# Altium PCB PCB1.PcbDoc
Units mm, origin at the board's own origin, x right, y up, seen from the top; angles counter-clockwise.
Board outline 145 x 103 mm, 2 copper layers (Top Layer, Bottom Layer); 80 components, 100 nets, 338 pads, 57 vias.
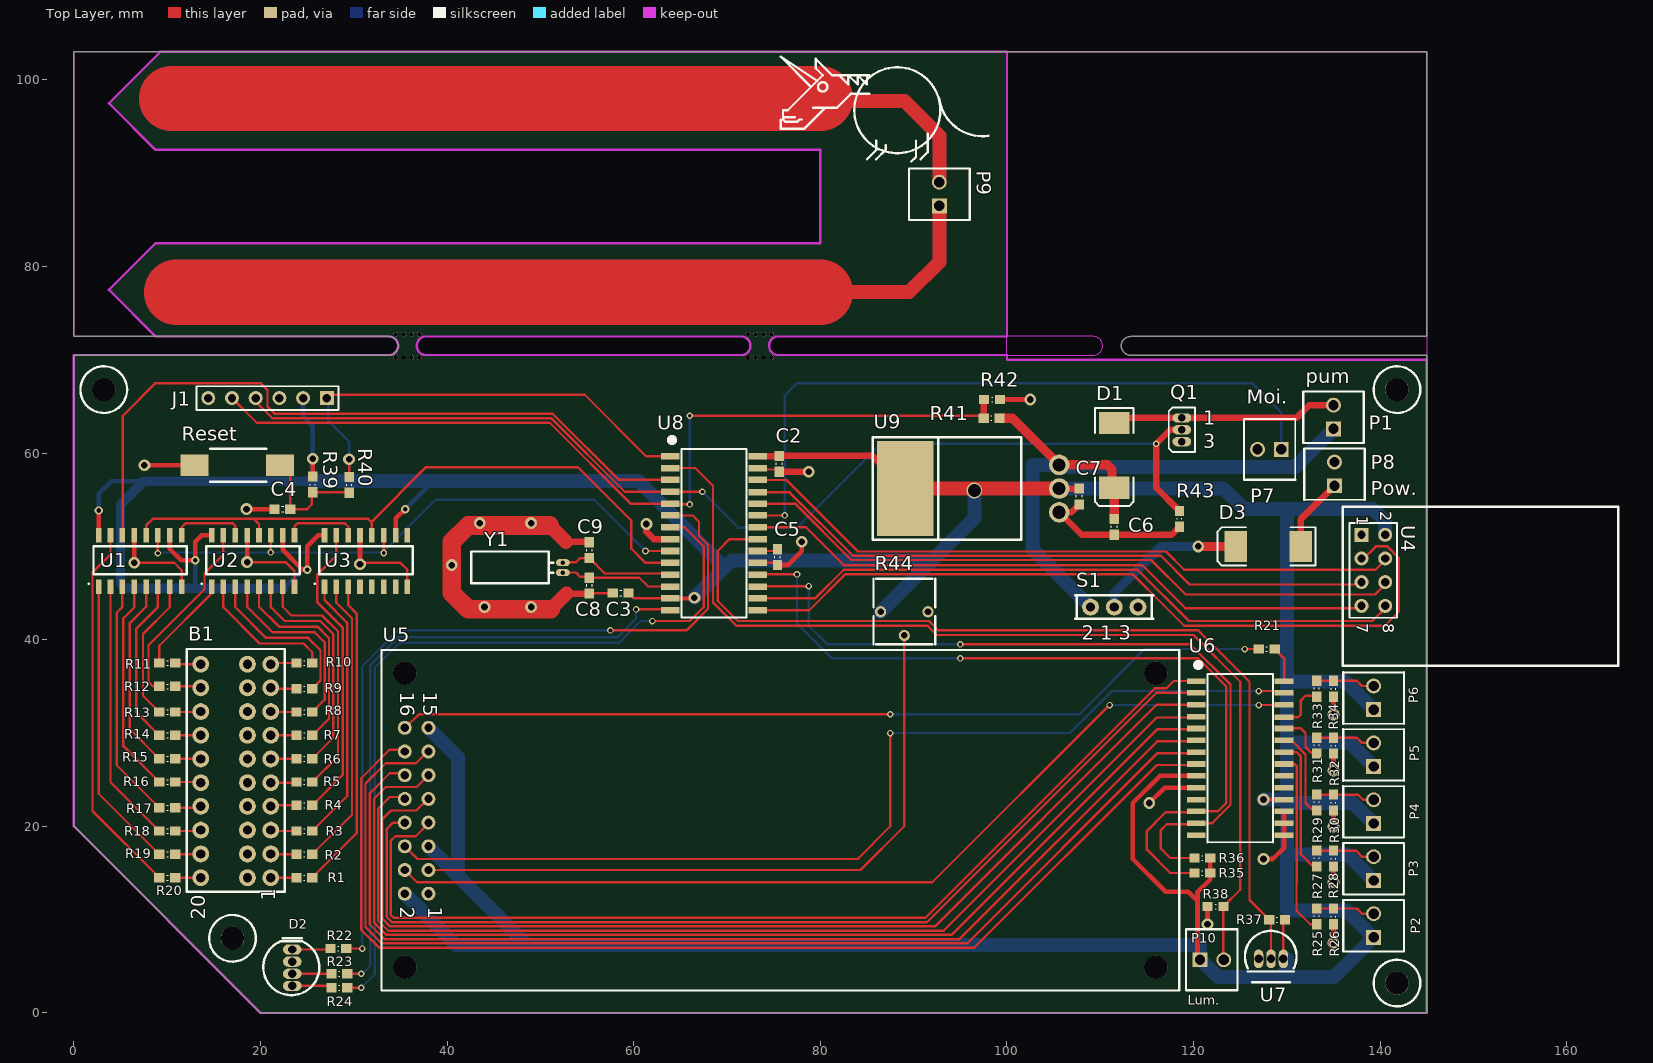
[diagram p0: Top Layer view]
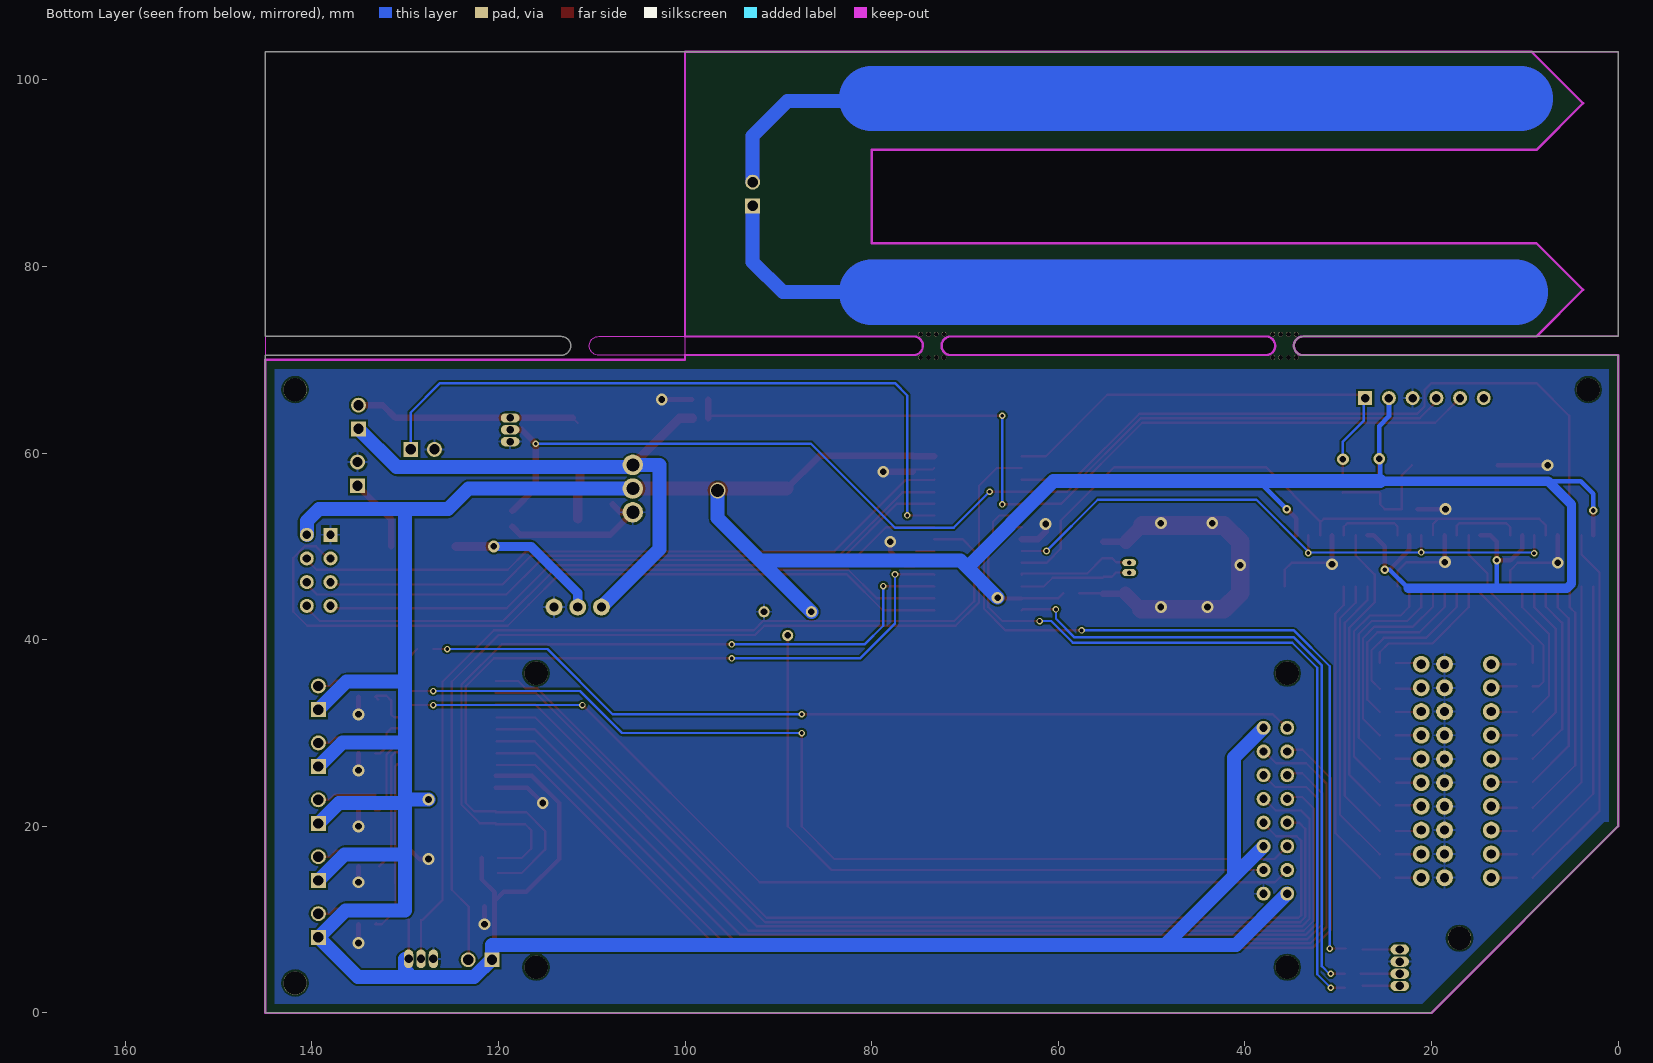
[diagram p1: Bottom Layer view, seen from below]

## Layer stack, top to bottom
Top Solder: solder mask 0.0102, Solder Resist, Dk 3.5
Top Layer: signal copper 0.0356
Dielectric 1: dielectric 0.32, FR-4, Dk 4.8
Bottom Layer: signal copper 0.0356
Bottom Solder: solder mask 0.0102, Solder Resist, Dk 3.5

## Board outline
20,0 0,20 0,70.5 33.75,70.5 ccw(c33.75,71.5) 33.75,72.5 0,72.5 0,103 145,103 145,72.5 113.25,72.5 ccw(c113.25,71.5) 113.25,70.5 145,70.5 145,70 145,0
cut-out: 100,70 100,103 145,103 145,70
cut-out: 0.642,72.5 8.75,72.5 3.75,77.5 8.75,82.5 80,82.5 80,92.5 8.75,92.5 3.75,97.5 9.25,103 0,103 0,72.5
cut-out: 37.75,70.5 71.5,70.5 ccw(c71.5,71.5) 71.5,72.5 37.75,72.5 ccw(c37.75,71.5)
cut-out: 75.5,70.5 109.25,70.5 ccw(c109.25,71.5) 109.25,72.5 75.5,72.5 ccw(c75.5,71.5)

## Design rules (kind name [scope] priority, off if disabled: settings)
Clearance [All] p1: gap=0.2
HoleSize [All] p1: absolutevalues=TRUE maxlimit=3 minlimit=0.3 maxpercent=80.000 minpercent=20.000
MinimumSolderMaskSliver [All] p1: minsoldermaskwidth=0.1
PlaneClearance [All] p1: clearance=0.2
PolygonConnect Via [All vs IsVia] p1: connectstyle=Direct reliefconductorwidth=0.254 reliefentries=4 polygonreliefangle="90 Angle" airgapwidth=0.254
PolygonConnect PolygonConnect_1 [All] p2: connectstyle=Relief reliefconductorwidth=0.254 reliefentries=4 polygonreliefangle="90 Angle" airgapwidth=0.254
RoutingVias [All] p1: holewidth=0.711 width=1.27 viastyle="Through Hole" minholewidth=0.3 minwidth=1.27 maxholewidth=1 maxwidth=2
SilkToSilkClearance [All] p1: silktosilkclearance=0.1
SilkToSolderMaskClearance [IsPad] p1: minsilkscreentomaskgap=0.1 clearancetoexposedcopper=TRUE
SolderMaskExpansion [All] p1: expansion=0.102
UnpouredPolygon [All] p1: allowunpoured=FALSE
Width [All] p1: maxlimit=25 minlimit=0.2 preferedwidth=0.254
24 further rules are at their usual default settings.

## Classes and differential pairs
component class BarGraph: B1 R1 R2 R3 R4 R5 R6 R7 R8 R9 R10 R11 R12 R13 R14 R15 R16 R17 R18 R19 R20 U1 U2 U3
component class "Ecran LCD": R21 U5
component class LedAlert: D2 R22 R23 R24
component class "Level Sensor": P2 P3 P4 P5 P6 R25 R26 R27 R28 R29 R30 R31 R32 R33 R34
component class LumSensor: P10 R38
component class MCP23017: R35 R36
component class PIC32MX170F256B: C2 C3 C4 C5 C8 C9 J1 R39 R40 Reset U8 Y1
component class Power: C6 C7 D3 P8 R41 R42 S1 U9
component class Pump: D1 P1 PUMP Q1 R43
component class SoilMoisture: P7 P9
component class TempSensor: R37 U7
net class ELECTRODE[0..4]: ELECTRODE0 ELECTRODE1 ELECTRODE2 ELECTRODE3 ELECTRODE4
net class I2C[0..1]: I2C0 I2C1
net class LCD[0..10]: LCD0 LCD1 LCD2 LCD3 LCD4 LCD5 LCD6 LCD7 LCD8 LCD9 LCD10
net class LED[0..2]: LED0 LED1 LED2
net class RD[0..2]: RD0 RD1 RD2
net class SPI[0..3]: SPI0 SPI1 SPI2 SPI3

## Components (designator, comment, footprint, x,y, rotation, side; value= is the part's Value field where it differs from the comment)
B1 "BargraphRG" BargraphRG 18.6,14.5 r90 top
C2 "0.1uF" C0603 75.6,58 r90 top
C3 "0.1uF" C0603 57.75,45 r0 top
C4 "0.1uF" C0603 21.5,54 r0 top
C5 "10uF" C0603 75.4,49.7 r270 top
C6 "10uF" C0603 111.5,51.25 r90 top
C7 "100nF" C0603 107.75,54.5 r90 top
C8 "15pF" C0603 55.25,44.95 r90 top
C9 "15pF" C0603 55.25,50.45 r270 top
D1 "Diode" SMC 111.5,59.75 r270 top
D2 "LED_RGB" LED1 23.4,4.9 r90 top
D3 "Diode" SMC 128,50 r180 top
J1 "Program/Debug" HDR1X6 27.1,65.9 r180 top
P1 "Header Pompe" BORNIER 135,62.6 r90 top
P2 "Header 2" BORNIER 139.3,8.1 r90 top
P3 "Header 2" BORNIER 139.3,14.2 r90 top
P4 "Header 2" BORNIER 139.3,20.3 r90 top
P5 "Header 2" BORNIER 139.3,26.4 r90 top
P6 "Header 2" BORNIER 139.3,32.5 r90 top
P7 "Header Sensor" BORNIER 129.4,60.4 r180 top
P8 "Header BAT" BORNIER 135.1,56.5 r90 top
P9 "Header Sensor" BORNIER 92.75,86.5 r90 top
P10 "Header 2" BORNIER 120.7,5.7 r0 top
Q1 "IRFZ24N" E3 118.75,62.5 r0 top
R1 "220Ω" R0603 23.85,14.5 r0 top
R2 "220Ω" R0603 23.85,17 r0 top
R3 "220Ω" R0603 23.85,19.5 r0 top
R4 "220Ω" R0603 23.85,22.25 r0 top
R5 "220Ω" R0603 23.85,24.75 r0 top
R6 "220Ω" R0603 23.85,27.25 r0 top
R7 "220Ω" R0603 23.85,29.75 r0 top
R8 "220Ω" R0603 23.85,32.25 r0 top
R9 "220Ω" R0603 23.85,34.75 r0 top
R10 "220Ω" R0603 23.85,37.5 r0 top
R11 "160Ω" R0603 10.85,37.5 r180 top
R12 "160Ω" R0603 10.85,35 r180 top
R13 "160Ω" R0603 10.85,32.25 r180 top
R14 "160Ω" R0603 10.85,29.75 r180 top
R15 "160Ω" R0603 10.85,27.25 r180 top
R16 "160Ω" R0603 10.85,24.75 r180 top
R17 "160Ω" R0603 10.85,22 r180 top
R18 "160Ω" R0603 10.85,19.5 r180 top
R19 "160Ω" R0603 10.85,17 r180 top
R20 "160Ω" R0603 10.85,14.5 r180 top
R21 "600Ω" R0603 127,39 r0 top
R22 "140Ω" R0603 27.5,6.9 r0 top
R23 "20Ω" R0603 27.6,4.2 r0 top
R24 "30Ω" R0603 27.6,2.7 r0 top
R25 "1KΩ" R0603 133.2,11.2 r270 top
R26 "10MΩ" R0603 135,9.5 r90 top
R27 "1KΩ" R0603 133.2,17.4 r270 top
R28 "10MΩ" R0603 135,15.7 r90 top
R29 "1KΩ" R0603 133.2,23.4 r270 top
R30 "10MΩ" R0603 135,21.7 r90 top
R31 "1KΩ" R0603 133.2,29.5 r270 top
R32 "10MΩ" R0603 135,27.8 r90 top
R33 "1KΩ" R0603 133.2,35.6 r270 top
R34 "10MΩ" R0603 135,33.9 r90 top
R35 "4.7KΩ" R0603 120.1,15 r0 top
R36 "4.7KΩ" R0603 120.1,16.6 r0 top
R37 "4.7K" R0603 128.1,10 r0 top
R38 "Res1" R0603 123.2,11.4 r180 top
R39 "10K" R0603 25.6,55.8 r90 top
R40 "1K" R0603 29.5,55.75 r90 top
R41 "2M" R0603 97.5,63.75 r0 top
R42 "1M" R0603 99.25,65.75 r180 top
R43 "10K" R0603 118.5,53.8 r270 top
R44 "RPot" POTARD 89,43 r180 top
Reset "SW-PB" Reset 22.1,58.7 r180 top
S1 "SW-On/Off" "Switch on/off" 111.5,43.5 r0 top
U1 "74HC595-0" SN74HC595D 7.1,48.5 r0 top
U2 "74HC595-1" SN74HC595D 19.2,48.5 r0 top
U3 "74HC595-2" SN74HC595D 31.3,48.5 r0 top
U4 "Nrf24L01" NRF24L01 138,51.25 r270 top
U5 "FC1602B04-FHYYBW-91LE" FC1602B04-FHYYBW-91LE 38,20.4 r270 top
U6 "MCP23017" MCP23017 125,29.3 r270 top
U7 "DS18B20+" DS18B20+ 128.3,5.8 r0 top
U8 "PIC32MX170F256B" PIC32MX170F256B 68.6,53.4 r270 top
U9 "LM1117D-33" VoltReg3.3V 105.6,56.2 r90 top
Y1 "32.768kHz" XTAL 52.4,47.75 r90 top

## Footprints (in the part's own frame and the unit in brackets; to place one, negate y for a bottom-side part, rotate by r counter-clockwise, add the part's x,y. Pads: shape width x height; smd on the part's side, far side on the other; paste and mask are expansions set on the pad)
BargraphRG [mm]
  round 1.8 hole 1: 1(0,-2.5) 2(2.54,-2.5) 3(5.1,-2.5) 4(7.64,-2.5) 5(10.18,-2.5) 6(12.72,-2.5) 7(15.26,-2.5) 8(17.8,-2.5) 9(20.34,-2.5) 10(22.88,-2.5) 11(22.88,5) 12(20.34,5) 13(17.8,5) 14(15.26,5) 15(12.72,5) 16(10.18,5) 17(7.64,5) 18(5.1,5) 19(2.54,5) 20(0,5) 21(0,0) 22(2.54,0) 23(5.1,0) 24(7.64,0) 25(10.18,0) 26(12.72,0) 27(15.26,0) 28(17.8,0) 29(20.34,0) 30(22.88,0)
  silkscreen extent -1.5,-4 24.5,6.5
BORNIER [mm]
  rect 1.6x1.6 hole 1.1: 1(0,0)
  round 1.6 hole 1.1: 2(2.54,0)
  silkscreen extent -1.5,-3.25 4,3.25
C0603 [mm]
  rect 1.1x1 smd: 1(0,0) 2(1.7,0)
  silkscreen extent 0.75,-0.3 0.97,0.3
DS18B20+ [mm] "DS18B20+"
  oval 1x2 hole 0.9: 1(-1.33,0) 2(0,0) 3(1.33,0)
  silkscreen extent -2.79,-2.5 2.74,3
E3 [mm] "TO, Flat Index; 3 In-Line, Axial Leads; Body Dia. 4.6mm; Lead Dia. 0.5 mm (max)"
  oval 2x1 hole 0.8: 1(0,1.27) 2(0,0) 3(0,-1.27)
  silkscreen extent -1.41,-2.41 1.41,2.41
FC1602B04-FHYYBW-91LE [mm] "LCD"
  round 1.5 hole 0.9: 1(7.62,0) 2(7.62,-2.54) 3(5.08,0) 4(5.08,-2.54) 5(2.54,0) 6(2.54,-2.54) 7(0,0) 8(0,-2.54) 9(-2.54,0) 10(-2.54,-2.54) 11(-5.08,0) 12(-5.08,-2.54) 13(-7.62,0) 14(-7.62,-2.54) 15(-10.16,0) 16(-10.16,-2.54)
  round 2.5 hole 2.5 unplated: NC(-16,77.96) NC(-16,-2.54) NC(15.5,77.96) NC(15.5,-2.54)
  silkscreen extent -18.5,-5.04 18,80.46
HDR1X6 [mm] "Connector; Header; 6 Position"
  rect 1.5x1.5 hole 0.9: 1(0,0)
  round 1.5 hole 0.9: 2(2.54,0) 3(5.08,0) 4(7.62,0) 5(10.16,0) 6(12.7,0)
  silkscreen extent -1.27,-1.27 13.97,1.27
LED1 [mm] "LedRGB"
  oval 1.1x2 hole 0.9: 1(1.9,0) 2(0.6,0) 3(-0.7,0) 4(-2,0)
  silkscreen extent -3,-2.9 3.1,3.1
MCP23017 [mm]
  rect 0.6x2 smd: 1(-6.27,-4.7) 2(-5,-4.7) 3(-3.73,-4.7) 4(-2.46,-4.7) 5(-1.19,-4.7) 6(0.08,-4.7) 7(1.35,-4.7) 8(2.62,-4.7) 9(3.89,-4.7) 10(5.16,-4.7) 11(6.43,-4.7) 12(7.7,-4.7) 13(8.97,-4.7) 14(10.24,-4.7) 15(10.24,4.7) 16(8.97,4.7) 17(7.7,4.7) 18(6.43,4.7) 19(5.16,4.7) 20(3.89,4.7) 21(2.62,4.7) 22(1.35,4.7) 23(0.08,4.7) 24(-1.19,4.7) 25(-2.39,4.7) 26(-3.73,4.7) 27(-5,4.7) 28(-6.27,4.7)
  silkscreen extent -8.05,-4.55 11.01,3.5
NRF24L01 [mm]
  rect 1.5x1.5 hole 0.9: 1(0,0)
  round 1.5 hole 0.9: 2(0,2.54) 3(2.54,0) 4(2.54,2.54) 5(5.08,0) 6(5.08,2.54) 7(7.62,0) 8(7.62,2.54)
  silkscreen extent -3,-2 14.03,27.5
PIC32MX170F256B [mm]
  rect 0.7x2 smd: 1(-6.27,-4.7) 2(-5,-4.7) 3(-3.73,-4.7) 4(-2.46,-4.7) 5(-1.19,-4.7) 6(0.08,-4.7) 7(1.35,-4.7) 8(2.62,-4.7) 9(3.89,-4.7) 10(5.16,-4.7) 11(6.43,-4.7) 12(7.7,-4.7) 13(8.97,-4.7) 14(10.24,-4.7) 15(10.24,4.7) 16(8.97,4.7) 17(7.7,4.7) 18(6.43,4.7) 19(5.16,4.7) 20(3.89,4.7) 21(2.62,4.7) 22(1.35,4.7) 23(0.08,4.7) 24(-1.19,4.7) 25(-2.39,4.7) 26(-3.73,4.7) 27(-5,4.7) 28(-6.27,4.7)
  silkscreen extent -8.05,-4.55 11.01,3.5
POTARD [mm]
  round 1.2 hole 0.7: 1(2.54,0.005) 2(0,2.545) 3(-2.54,0.005)
  silkscreen extent -3.3,-3.52 3.3,3.5
R0603 [mm]
  rect 1.1x1 smd: 1(0,0) 2(1.7,0)
  silkscreen extent 0.76,-0.25 0.89,0.25
Reset [mm]
  rect 3x2.3 smd: 1(0,0) 2(9.2,0)
  silkscreen extent 1.5,-1.75 7.5,1.75
SMC [mm] "DO-214-AB/SMC; 2 C-Bend Leads; Body 7.9 x 5.9 mm, inc. leads (LxW)"
  rect 2.4x3.3 smd: 1(-3.475,0) 2(3.475,0)
  silkscreen extent -5.07,-2.05 5.43,2.05
SN74HC595D [mm]
  rect 0.6x1.55 smd: 1(-4.445,-2.8) 2(-3.175,-2.8) 3(-1.905,-2.8) 4(-0.635,-2.8) 5(0.635,-2.8) 6(1.905,-2.8) 7(3.175,-2.8) 8(4.445,-2.8) 9(4.445,2.7) 10(3.175,2.7) 11(1.905,2.7) 12(0.635,2.7) 13(-0.635,2.7) 14(-1.905,2.7) 15(-3.175,2.7) 16(-4.445,2.7)
  silkscreen extent -5.5,-2.5 5,1.5
"Switch on/off" [mm]
  round 1.8 hole 1: 1(0,0) 2(-2.54,0) 3(2.54,0)
  silkscreen extent -4.21,-1.25 4.21,1.25
VoltReg3.3V [mm]
  round 2.2 hole 1.4: 1(-2.54,0) 2(0,0) 3(2.54,0)
  rect 10.16x6.1 smd: 4(0,16.5)
  silkscreen extent -5.5,4.06 5.5,20
XTAL [mm]
  oval 0.75x1.5 hole 0.5: 1(-0.56,0) 2(0.51,0)
  silkscreen extent -1.7,1 1.7,9.8

## Part data
C2 C3 C4 C5 C6 C7 C8 C9: library part Cap, "Capacitor"
D1 D3: "Default Diode"
J1: library part "Header 6", "Header, 6-Pin"
P1 P7 P8 P9: library part "Header 2", "Header, 2-Pin"
P2 P3 P4 P5 P6 P10: "Header, 2-Pin"
Q1: library part MOSFET-N, "N-Channel MOSFET"
R1 R2 R3 R4 R5 R6 R7 R8 R9 R10 R11 R12 R13 R14 R15 R16 R17 R18 R19 R20 R21 R22 R23 R24 R25 R26 R27 R28 R29 R30 R31 R32 R33 R34 R35 R36 R37 R39 R40 R41 R42 R43: library part Res1, "Resistor"
R38: "Resistor"
R44: "Potentiometer"
Reset: "Switch"
S1: library part SW-SPDT, "SPDT Subminiature Toggle Switch, Right Angle Mounting, Vertical Actuation"
U1 U2 U3: library part 74HC595
U4: library part "Header 4X2", "Header, 4-Pin, Dual row"
U6: library part MPC23017
Y1: library part XTAL, "Crystal Oscillator"

## Free pads (board coordinates)
  round 2.5 hole 2.5 unplated: ""(3.2,66.8) ""(17,8) ""(141.8,3.2) ""(141.8,66.8)
  round 0.5 hole 0.5 unplated: ""(34.5,70.25) ""(34.5,72.75) ""(35.333,70.25) ""(35.333,72.75) ""(36.167,70.25) ""(36.167,72.75) ""(37,70.25) ""(37,72.75) ""(72.25,70.25) ""(72.25,72.75) ""(73.083,70.25) ""(73.083,72.75) ""(73.917,70.25) ""(73.917,72.75) ""(74.75,70.25) ""(74.75,72.75)

## Via types
v1: diameter 1.27, hole 0.711, Top Layer to Bottom Layer, 27 vias
v2: diameter 0.7, hole 0.4, Top Layer to Bottom Layer, 25 vias
v3: diameter 0.9, hole 0.5, Top Layer to Bottom Layer, 4 vias
v4: diameter 1.7, hole 1.4, Top Layer to Bottom Layer, 1 vias

## Nets (pads, with @x,y where several pads share a name; then routed paths per layer and width w, separated by ;. In a path a pad name is that pad's centre, name@x,y a point inside that pad or via, vN(x,y) a via of type N, cw(c..) or ccw(c..) an arc to the next point about the centre after c; other vN are vias at no path point)
3.3V: C2.2 C3.2 C7.2 J1.2 P2.1 P3.1 P4.1 P5.1 P6.1 P10.1 R35.2 R36.2 R37.2 R39.2 R44.1 U1.10 U1.16 U2.10 U2.16 U3.10 U3.16 U4.2 U5.2 U5.5 U5.15 U6.9 U6.18 U7.3 U8.13 U8.28 U9.2 U9.4 | length 559.5
  Top Layer w0.254: C3.2 60.02,44.43 U8.13 ; v1@66.43,44.43 v1(66.5,44.5) ; U7.3 R37.2@129.63,10
  Top Layer w0.4: U8.13 v1@66.43,44.43 ; v1(127.5,22.87) U6.18
  Top Layer w0.5: U1.16 v3(2.655,53.845) ; U1.10 10.275,49.725 11.5,48.5 v3(13,48.5) 13,50.5 13.7,51.2 U2.16 ; U2.10 22.375,49.625 24.5,47.5 v3(25,47.5) 25,50 26.2,51.2 U3.16 ; R39.2 v1(25.6,59.4) ; U3.10 34.5,51.225 34.5,53 v3(35.5,54) ; U6.9 116.41,25.41 113.5,22.5 113.5,16.5 117,13 119.415,13 120.415,12 ; P10.1 120.415,5.985 120.415,12 ; R36.2 R35.2 121.8,14.3 120.415,12.915 120.415,12
  Top Layer w0.7: U8.28 75.57,59.67 C2.2 85.6,59.7 U9.4 ; U9.2 C7.2
  Top Layer w1.5: U9.4 U9.2
  Bottom Layer w0.5: v3(2.655,53.845) 2.655,55.655 4,57 7.5,57 ; 13,45.5 v3(13,48.5) ; 22.5,45.5 24.5,47.5 v3(25,47.5) ; J1.2 24.56,63.94 25.6,62.9 v1(25.6,59.4) ; 25.5,57 v1@25.5,59.3 ; v3(35.5,54) 38.5,57
  Bottom Layer w1: 22.5,45.5 13,45.5 5.5,45.5 5,46 5,54.5 7.5,57 25.5,57 ; 129.5,3.85 129.5,4.449 129.75,4.699 U7.3@129.75,5.8
  Bottom Layer w1.5: 25.5,57 38.5,57 60.5,57 69.75,47.75 ; U5.2 40.94,7.3 48.56,7.3 ; U5.5 41.18,14.68 ; U5.15 41.18,27.38 41.18,14.68 ; v1(66.5,44.5) 69.75,47.75 ; R44.1 91.965,48.5 ; v4(96.5,56) 96.5,53.035 91.965,48.5 ; U9.2 123.2,56.2 125.4,54 130,54 ; v1(127.5,22.87) 129.63,22.87 130,22.5 ; 130,3.85 U7.3@130,5.8 ; P3.1 136.5,17 130,17 ; P4.1 137.1,22.5 130,22.5 ; P5.1 136.7,29 130,29 ; P6.1 136.3,35.5 130,35.5 ; U4.2 140.54,52.71 139.25,54 130,54 ; 41.18,14.68 48.56,7.3 ; 48.56,7.3 120.7,7.3 P10.1 120.765,5.7 122.615,3.85 129.5,3.85 135.05,3.85 P2.1 136.4,11 130,11 130,17 ; 69.75,47.75 70.5,48.5 91.965,48.5 ; 130,17 130,22.5 ; 130,22.5 130,29 ; 130,29 130,35.5 ; 130,35.5 130,54
7.4V: C6.2 D1.2 P1.1 R41.2 S1.2 U9.3 | length 71.5
  Top Layer w1: R41.2 100.59,63.75 U9.3 105.61,58.75 110.75,58.75 111.25,58.25 111.25,56.525 D1.2 C6.2
  Bottom Layer w1.5: U9.3@105.6,58.5 130.9,58.5 P1.1 ; U9.3 102.74,58.74 102.74,49.72 S1.2
"BAT. LVL.": J1.5 R41.1 R42.2 U8.5 | length 96.8
  Top Layer w0.254: J1.5 19.59,63.25 51,63.25 59.66,54.59 U8.5 63.99,54.5 v2(66,54.5) ; v2(66,64) 97.25,64 R41.1
  Top Layer w0.7: R41.1 R42.2@97.5,65.7
  Bottom Layer w0.254: v2(66,54.5) 66,55.68 v2(66,64)
CE: U4.3 U8.15 | length 83.9
  Top Layer w0.254: U8.15 78.802,43.16 82.642,47 113.5,47 116.75,43.75 119,41.5 140.5,41.5 142,43 142,48.773 140.773,50 139.54,50 U4.3@138.125,48.585
ELEC1: P9.1 | length 178.2
  Top Layer w1.5: 80,77.25 89.5,77.25 92.75,80.5 P9.1
  Top Layer w7: 11,77.25 80,77.25
  Bottom Layer w1.5: 80,77.25 89.5,77.25 92.75,80.5 P9.1
  Bottom Layer w7: 11,77.25 80,77.25
ELEC2: P9.2 | length 177.5
  Top Layer w1.5: 80,97.75 89,97.75 92.75,94 P9.2
  Top Layer w7: 10.5,98 80,98
  Bottom Layer w1.5: 80,97.75 89,97.75 92.75,94 P9.2
  Bottom Layer w7: 10.5,98 80,98
ELECTRODE0: R25.2 U6.21 | length 19.8
  Top Layer w0.254: U6.21 130.82,26.68 131.046,26.454 131.046,13.906 131.038,13.898 131.038,10.962 132.5,9.5 R25.2 R25.2@133.1,9.6
ELECTRODE1: R27.2 U6.22 | length 14.3
  Top Layer w0.254: U6.22 131.05,27.95 131.5,27.5 131.5,17 R27.2@132.8,15.7
ELECTRODE2: R29.2 U6.23 | length 9.7
  Top Layer w0.254: U6.23 130.48,29.22 132,27.7 132,22.5 132.8,21.7 R29.2
ELECTRODE3: R31.2 U6.24 | length 5.5
  Top Layer w0.254: U6.24@129.71,30.5 131.5,30.5 132,30 132,28.5 132.7,27.8 R31.2
ELECTRODE4: R33.2 U6.25 | length 5.8
  Top Layer w0.254: U6.25 131.19,31.69 131.5,32 131.5,33.5 132,34 133.1,34 R33.2 R33.2@132.9,33.6
GND: B1.21 B1.22 B1.23 B1.24 B1.25 B1.26 B1.27 B1.28 B1.29 B1.30 C2.1 C3.1 C4.1 C5.2 C6.1 C7.1 C8.1 C9.1 D2.2 J1.3 P7.2 P8.2 Q1.3 R26.1 R28.1 R30.1 R32.1 R34.1 R38.2 R42.1 R43.2 R44.3 Reset.2 S1.3 U1.8 U1.13 U2.8 U2.13 U3.8 U3.13 U4.1 U5.1 U6.10 U6.15 U6.16 U6.17 U7.1 U8.8 U8.19 U8.27 U9.1 | length 138.1
  Top Layer w0.254: v1(6.465,48.25) 10.75,48.25 11.545,47.455 U1.8 ; v1(18.565,48.315) 22.685,48.315 23.645,47.355 U2.8 ; v1(30.665,48.085) 30.82,48.24 35.01,48.24 35.745,47.505 U3.8 ; C8.1@55.3,45 C3.1 ; U8.19 C5.2@75.16,48.24 ; U8.27 73.45,58.25 C2.1@75.6,58.25
  Top Layer w0.5: v1(6.465,48.25) U1.13 ; v1(7.55,58.7) Reset.2 ; v1(18.5,54) C4.1 ; v1(18.565,48.315) U2.13 ; v1(30.665,48.085) U3.13 ; C5.2@75.16,48.24 C5.2 76.5,48 78,49.5 v1(78,50.5) ; R42.1 v1(102.5,65.75) ; v1(115.25,22.5) 116.89,24.14 U6.10 ; v1(121.5,9.5) R38.2 ; v1(127.5,16.5) 128.5,16.5 129.7,17.7 U6.15 U6.16 U6.17 ; v1(135,7.5) R26.1 ; v1(135,14) R28.1 ; v1(135,20) R30.1 ; v1(135,26) R32.1 ; v1(135,32) R34.1
  Top Layer w0.7: 52.75,50.5 C9.1@55.2,50.5 ; 52.8,44.95 C8.1 ; v1(61.35,52.4) 61.35,51.6 62.17,50.78 U8.8 ; C2.1 v1(78.75,58) ; C7.1 106.91,53.66 U9.1 108.01,51.25 C6.1 117.65,51.25 R43.2
  Top Layer w1.5: 51,52.25 52.75,50.5 ; 51.1,43.25 52.8,44.95
  Top Layer w2: 51,52.25 42.25,52.25 40.5,50.5 40.5,45 42.25,43.25 51.1,43.25
  other v1: 44,43.5 49,43.5 40.5,48 43.5,52.5 49,52.5
I2C0: R35.1 U6.12 U8.18 | length 88.6
  Top Layer w0.254: U8.18 73.33,47 v2(77.5,47) ; v2(95,38) 120.5,38 123.5,35 123.5,22.5 122.6,21.6 U6.12 ; R35.1 117.5,15 115,17.5 115,19.5 117,21.5 U6.12@120.3,21.5
  Bottom Layer w0.254: v2(77.5,47) 77.5,41.75 81.25,38 v2(95,38)
I2C1: R36.1 U6.13 U8.17 | length 85
  Top Layer w0.254: U8.17 73.35,45.75 v2(78.75,45.75) ; v2(95,39.5) 119.642,39.5 123.954,35.188 123.954,22.312 122,20.358 122,20.33 U6.13 ; R36.1 117.5,16.6 116.5,17.6 116.5,19.6 117.13,20.23 U6.13@120.3,20.23
  Bottom Layer w0.254: v2(78.75,45.75) 78.75,41.5 80.75,39.5 v2(95,39.5)
LCD0: U5.7 U6.1 | length 109.7
  Top Layer w0.254: U5.7@38,20.3 36.637,18.937 34.437,18.937 33.978,18.478 33.978,10.476 34.271,10.183 91.241,10.183 115.858,34.8 117.1,34.8 117.87,35.57 U6.1
LCD1: U5.8 U6.2 | length 108.8
  Top Layer w0.254: U5.8 34.2,20.4 33.524,19.724 33.524,10.288 34.083,9.729 91.429,9.729 116,34.3 U6.2
LCD2: U5.9 U6.3 | length 113.9
  Top Layer w0.254: U5.9@37.94,22.94 36.7,21.7 34,21.7 33.07,20.77 33.07,10.1 33.895,9.275 92.275,9.275 116.03,33.03 U6.3
LCD3: U5.10 U6.4 | length 112.7
  Top Layer w0.254: U5.10@35.26,23.14 33.86,23.14 32.616,21.896 32.616,9.888 33.688,8.816 93.216,8.816 116.06,31.66 U6.4@120.2,31.66
LCD4: U5.11 U6.5 | length 117.9
  Top Layer w0.254: U5.11 36.737,24.217 33.414,24.217 32.162,22.965 32.162,9.7 33.5,8.362 94.062,8.362 116.09,30.39 U6.5@120.2,30.39
LCD5: U5.12 U6.6 | length 116.4
  Top Layer w0.254: U5.12@35.26,25.68 33.86,25.68 31.708,23.528 31.708,9.5 33.3,7.908 94.908,7.908 116.12,29.12 U6.6@120.2,29.12
LCD6: U5.13 U6.7 | length 121.7
  Top Layer w0.254: U5.13 37.92,28.02 36.657,26.757 33.414,26.757 31.254,24.597 31.254,9.2 33,7.454 95.754,7.454 116.15,27.85 U6.7@120.2,27.85
LCD7: U5.14 U6.8 | length 120.6
  Top Layer w0.254: U5.14 35.26,28.22 33.86,28.22 30.8,25.16 30.8,8.9 32.7,7 96.5,7 116.08,26.58 U6.8@120.2,26.58
LCD8: U5.4 U6.26 | length 102.7
  Top Layer w0.254: U5.4 36.78,14 92,14 v2(111,33) ; v2(127,33) 129.67,33 U6.26
  Bottom Layer w0.254: v2(111,33) v2(127,33)
LCD9: U5.6 U6.27 | length 108.2
  Top Layer w0.254: U5.6 36.82,16.5 84,16.5 87.5,20 v2(87.5,30) ; v2(127,34.5) 129.5,34.5 U6.27
  Bottom Layer w0.254: v2(87.5,30) 106.75,30 111.25,34.5 v2(127,34.5)
LCD10: R21.2 U6.28 | length 3.8
  Top Layer w0.254: R21.2 129.7,38 U6.28
LED0: R22.2 U8.6 | length 84.7
  Top Layer w0.254: R22.2 v2(30.9,6.9) ; v2(57.5,41) 65.642,41 67.954,43.312 67.954,50.188 67,51.142 67,52.64 66.32,53.32 U8.6
  Bottom Layer w0.254: v2(30.9,6.9) 30.9,37.15 34.75,41 v2(57.5,41)
LED1: R23.2 U8.14 | length 70.3
  Top Layer w0.254: R23.2 v2(30.8,4.2) ; v2(60.25,43.25) 63.81,43.25 U8.14
  Bottom Layer w0.254: v2(30.8,4.2) 30.95,4.2 31.75,5 31.75,37.25 34.75,40.25 58.25,40.25 60.25,42.25 v2(60.25,43.25)
LED2: R24.2 U8.7 | length 85.3
  Top Layer w0.254: R24.2 v2(30.8,2.7) ; v2(62,42) 66,42 67.5,43.5 67.5,50 65.45,52.05 U8.7
  Bottom Layer w0.254: v2(30.8,2.7) 32.25,4.15 32.25,37 34.929,39.679 58.429,39.679 60.75,42 v2(62,42)
LUM: P10.2 R38.1 U8.2 | length 108.4
  Top Layer w0.254: U8.2 66.6,58.4 68.5,56.5 68.5,44 71,41.5 91.5,41.5 92.5,40.5 120,40.5 125,35.5 125,13.2 R38.1 P10.2@123.2,5.74
MCLR: J1.1 R40.2 U8.1 | length 49.1
  Top Layer w0.254: J1.1 27.45,66.25 54.75,66.25 61.33,59.67 U8.1 ; R40.2 v1(29.5,59.35)
  Bottom Layer w0.254: J1.1 27.25,65.75 27.25,63.5 29.5,61.25 v1(29.5,59.35)
MOISTSENSOR: P7.1 U8.23 | length 74.8
  Top Layer w0.254: U8.23 v2(76.18,53.32)
  Bottom Layer w0.254: v2(76.18,53.32) 76.18,66.18 77.5,67.5 126.25,67.5 129.4,64.35 P7.1
NetB1_1: B1.1 R1.1 | length 2.7
  Top Layer w0.254: B1.1 R1.1
NetB1_2: B1.2 R2.1 | length 2.7
  Top Layer w0.254: B1.2@21.14,17 R2.1
NetB1_3: B1.3 R3.1 | length 2.6
  Top Layer w0.254: B1.3@21.2,19.5 R3.1
NetB1_4: B1.4 R4.1 | length 2.6
  Top Layer w0.254: B1.4@21.21,22.25 R4.1
NetB1_5: B1.5 R5.1 | length 2.7
  Top Layer w0.254: B1.5 R5.1@23.78,24.68
NetB1_6: B1.6 R6.1 | length 2.7
  Top Layer w0.254: B1.6@21.13,27.25 R6.1
NetB1_7: B1.7 R7.1 | length 2.7
  Top Layer w0.254: B1.7@21.11,29.75 R7.1
NetB1_8: B1.8 R8.1 | length 2.7
  Top Layer w0.254: B1.8@21.15,32.25 R8.1
NetB1_9: B1.9 R9.1 | length 2.7
  Top Layer w0.254: B1.9@21.19,34.75 R9.1
NetB1_10: B1.10 R10.1 | length 2.6
  Top Layer w0.254: B1.10@21.22,37.5 R10.1
NetB1_11: B1.11 R11.1 | length 2.6
  Top Layer w0.254: R11.1@10.97,37.38 B1.11
NetB1_12: B1.12 R12.1 | length 2.6
  Top Layer w0.254: R12.1 B1.12@13.44,35
NetB1_13: B1.13 R13.1 | length 2.7
  Top Layer w0.254: R13.1 B1.13@13.55,32.25
NetB1_14: B1.14 R14.1 | length 2.7
  Top Layer w0.254: R14.1 B1.14@13.59,29.75
NetB1_15: B1.15 R15.1 | length 2.7
  Top Layer w0.254: R15.1 B1.15@13.57,27.25
NetB1_16: B1.16 R16.1 | length 2.7
  Top Layer w0.254: R16.1 B1.16@13.53,24.75
NetB1_17: B1.17 R17.1 | length 2.6
  Top Layer w0.254: R17.1 B1.17@13.46,22
NetB1_18: B1.18 R18.1 | length 2.6
  Top Layer w0.254: R18.1 B1.18@13.5,19.5
NetB1_19: B1.19 R19.1 | length 2.7
  Top Layer w0.254: R19.1 B1.19@13.56,17
NetB1_20: B1.20 R20.1 | length 2.7
  Top Layer w0.254: R20.1 B1.20
NetC4_2: C4.2 R39.1 R40.1 Reset.1 | length 13
  Top Layer w0.254: Reset.1 23.2,57.6 C4.2 25,54 25.5,54.5 25.5,55.7 R39.1 R40.1@29.5,55.8 ; R40.1@29.45,55.8 R40.1
NetC5_1: C5.1 U8.20 | length 1.9
  Top Layer w0.254: U8.20 C5.1@75.21,49.51
NetD1_1: D1.1 P1.2 Q1.1 | length 24.3
  Top Layer w0.254: D1.1 D1.1@112.045,63.77
  Top Layer w0.7: D1.1@112.045,63.77 Q1.1 131.02,63.77 132.39,65.14 P1.2
NetD2_1: D2.1 R22.1 | length 4
  Top Layer w0.254: D2.1 R22.1@27.4,6.8
NetD2_3: D2.3 R23.1 | length 4.2
  Top Layer w0.254: D2.3 R23.1
NetD2_4: D2.4 R24.1 | length 4
  Top Layer w0.254: D2.4 R24.1@27.4,2.9
NetD3_1: D3.1 P8.1 | length 8
  Top Layer w0.7: D3.1 131.475,52.875 P8.1
NetD3_2: D3.2 S1.1 | length 16.6
  Top Layer w1: v1(120.5,50) D3.2
  Bottom Layer w1: S1.1 111.5,45 116.5,50 v1(120.5,50)
NetP2_2: P2.2 R25.1 R26.2 | length 6.3
  Top Layer w0.254: R25.1 R26.2 137.5,11.2 138.06,10.64 P2.2
NetP3_2: P3.2 R27.1 R28.2 | length 6.5
  Top Layer w0.254: R27.1 R28.2 137.4,17.4 138.06,16.74 P3.2 P3.2@139.24,16.8
NetP4_2: P4.2 R29.1 R30.2 | length 6.3
  Top Layer w0.254: R29.1 R30.2 137.6,23.4 138.16,22.84 P4.2
NetP5_2: P5.2 R31.1 R32.2 | length 6.3
  Top Layer w0.254: R31.1 R32.2 137.5,29.5 138.06,28.94 P5.2
NetP6_2: P6.2 R33.1 R34.2 | length 6.3
  Top Layer w0.254: R33.1 R34.2 137.5,35.6 138.06,35.04 P6.2
NetR1_2: R1.2 U3.3 | length 33.5
  Top Layer w0.254: R1.2 30.3,19.25 30.3,42.8 29.395,43.705 U3.3
NetR2_2: R2.2 U3.2 | length 31.2
  Top Layer w0.254: R2.2 29.8,21.25 29.8,42.3 28.125,43.975 U3.2
NetR3_2: R3.2 U3.1 | length 28.8
  Top Layer w0.254: R3.2 29.3,23.25 29.3,41.8 26.855,44.245 U3.1
NetR4_2: R4.2 U3.15 | length 32.3
  Top Layer w0.254: R4.2 28.8,25.5 28.8,41.3 26.1,44 26.1,47 28.125,49.025 U3.15
NetR5_2: R5.2 U2.7 | length 26.5
  Top Layer w0.254: U2.7 22.375,43.525 23.3,42.6 26.6,42.6 28.3,40.9 28.3,27.5 R5.2
NetR6_2: R6.2 U2.6 | length 24.4
  Top Layer w0.254: U2.6 21.105,43.495 22.6,42 26.4,42 27.8,40.6 27.8,29.5 R6.2
NetR7_2: R7.2 U2.5 | length 22.2
  Top Layer w0.254: U2.5 19.835,43.54 21.975,41.4 26.1,41.4 27.335,40.165 27.335,31.535 R7.2
NetR8_2: R8.2 U2.4 | length 20.1
  Top Layer w0.254: U2.4 18.565,43.535 21.3,40.8 25.8,40.8 26.881,39.719 26.881,33.581 R8.2
NetR9_2: R9.2 U2.3 | length 17.7
  Top Layer w0.254: U2.3 17.295,43.505 20.6,40.2 25.1,40.2 26.427,38.873 26.427,35.627 R9.2
NetR10_2: R10.2 U2.2 | length 14.9
  Top Layer w0.254: U2.2 16.025,43.475 19.9,39.6 24.6,39.6 25.55,38.65 R10.2
NetR11_2: R11.2 U2.1 | length 10.5
  Top Layer w0.254: R11.2 9.15,39.35 14.755,44.955 U2.1
NetR12_2: R12.2 U2.15 | length 20.4
  Top Layer w0.254: R12.2 8.5,35 8,35.5 8,39.4 14,45.4 14,47.1 16.025,49.125 U2.15
NetR13_2: R13.2 U1.7 | length 15.4
  Top Layer w0.254: R13.2 7.4,34 7.4,40.6 10.275,43.475 U1.7
NetR14_2: R14.2 U1.6 | length 17.9
  Top Layer w0.254: U1.6 9.005,43.505 6.7,41.2 6.7,32.2 R14.2
NetR15_2: R15.2 U1.5 | length 20.5
  Top Layer w0.254: U1.5 7.735,43.535 6,41.8 6,30.4 R15.2
NetR16_2: R16.2 U1.4 | length 23
  Top Layer w0.254: U1.4 6.465,43.465 5.3,42.3 5.3,28.6 R16.2
NetR17_2: R17.2 U1.3 | length 25.8
  Top Layer w0.254: U1.3 5.195,43.495 4.6,42.9 4.6,26.55 R17.2
NetR18_2: R18.2 U1.2 | length 28.4
  Top Layer w0.254: U1.2 3.925,24.725 R18.2
NetR19_2: R19.2 U1.1 | length 31.4
  Top Layer w0.254: U1.1 2.655,23.495 R19.2
NetR20_2: R20.2 U1.15 | length 40.5
  Top Layer w0.254: U1.15 3.925,49.125 2,47.2 2,21.65 R20.2
NetR21_1: R21.1 U5.16 | length 95
  Top Layer w0.254: U5.16 37,32 v2(87.5,32) ; v2(125.5,39) R21.1
  Bottom Layer w0.254: v2(87.5,32) 107.75,32 114.75,39 v2(125.5,39)
NetR44_3: R44.2 U5.3 | length 73.4
  Top Layer w0.254: U5.3 84.32,15.32 89,20 R44.2
NetU1_9: U1.9 U2.14 | length 7.9
  Top Layer w0.254: U1.9 11.545,52.045 12,52.5 17,52.5 17.295,52.205 U2.14
NetU2_9: U2.9 U3.14 | length 7.9
  Top Layer w0.254: U2.9 23.645,52.145 24,52.5 29,52.5 29.395,52.105 U3.14
NetU4_8: U4.8 U8.16 | length 71.5
  Top Layer w0.254: U8.16 79.43,44.43 82.5,47.5 114,47.5 119.5,42 139.16,42 U4.8@140.665,43.505
PUMP: J1.4 Q1.2 R43.1 U8.4 | length 117.8
  Top Layer w0.254: J1.4 19.48,65.52 21.25,63.75 51.142,63.75 59.032,55.86 U8.4 v2(67.36,55.86)
  Top Layer w0.7: R43.1 116,56.3 v2(116,61) 117.5,62.5 Q1.2
  Bottom Layer w0.254: v2(67.36,55.86) 71.22,52 77.5,52 86.5,61 v2(116,61)
RD0: U1.14 U8.3 | length 78.2
  Top Layer w0.254: U1.14 5.25,51.255 5.25,64 8.75,67.5 20,67.5 20.75,66.75 20.75,65 21.546,64.204 51.33,64.204 58.404,57.13 U8.3
RD1: U1.12 U2.12 U3.12 U8.10 | length 69.5
  Top Layer w0.254: U1.12 7.735,52.235 8.454,52.954 19.296,52.954 ; U2.12 19.835,52.415 19.296,52.954 ; U3.12 31.935,52.565 ; U8.10 61.26,48.24 59.75,49.75 59.75,52.75 54,58.5 37.75,58.5 31.935,52.685 31.935,52.565 ; 19.296,52.954 31.546,52.954 31.935,52.565
RD2: U1.11 U2.11 U3.11 U8.9 | length 65.5
  Top Layer w0.254: v2(9.005,49.255) U1.11 ; v2(21.105,49.355) U2.11 ; v2(33.205,49.295) U3.11 ; v2(61.26,49.51) U8.9
  Bottom Layer w0.254: v2@8.855,49.355 v2(21.105,49.355) v2@33.205,49.355 ; v2(33.205,49.295) v2@33.205,49.355 ; v2(61.26,49.51) 55.77,55 38.75,55 33.205,49.455 v2@33.205,49.355
SOSCI: C9.2 U8.11 Y1.2 | length 12.8
  Top Layer w0.254: Y1.2@52.6,48.5 52.4,48.3 53.8,48.3 54.25,48.75 C9.2 56.896,47.104 63.9,47.104 U8.11
SOSCO: C8.2 U8.12 Y1.1 | length 12
  Top Layer w0.254: Y1.1@52.4,47.2 53.8,47.2 54.25,46.75 C8.2@55.15,46.75 ; C8.2 60.6,46.65 61.55,45.7 U8.12
SPI0: U4.7 U8.22 | length 68.3
  Top Layer w0.254: U8.22 78.45,52.05 82.5,48 114.5,48 119.12,43.38 U4.7@138,43.38
SPI1: U4.6 U8.24 | length 71.9
  Top Layer w0.254: U8.24 77.268,54.59 83.312,48.546 115.454,48.546 119.157,44.843 139.463,44.843 U4.6@140.665,46.045
SPI2: U4.5 U8.25 | length 68.8
  Top Layer w0.254: U8.25 76.71,55.79 83.5,49 116.5,49 119.58,45.92 U4.5@138,45.92
SPI3: U4.4 U8.26 | length 71.6
  Top Layer w0.254: U8.26 73.307,57.123 76.377,57.123 84.046,49.454 117.046,49.454 119,47.5 139.5,47.5 140.46,48.46 U4.4@140.54,48.46
TEMP: R37.1 U7.2 U8.21 | length 101.3
  Top Layer w0.254: U8.21 70.28,50.78 69,49.5 69,44.142 71.142,42 91.642,42 92.642,41 120.5,41 126,35.5 126,12.1 R37.1 ; U7.2 R37.1@128.3,10
pads on no net: J1.6 U3.4 U3.5 U3.6 U3.7 U3.9 U5.NC U6.11 U6.14 U6.19 U6.20

## Polygon pours and split planes (outlines as drawn)
GND on Bottom Layer "Bottom Layer-No Net" (solid, remove dead copper, pour order 4): 1,69 1,20.5 1.5,20.5 21,1 144,1 144,69

## Keep-outs
Keep-Out Layer:
  lines w0.254: 33.985,72.5 8.75,72.5 3.75,77.5 8.75,82.5 80,82.5 80,92.5 8.75,92.5 3.75,97.5 9.25,103 100,103 100,72.5 99.991,72.491 75.369,72.491 ; 34.009,72.466 cw(c33.75,71.5) 33.881,70.509 0.009,70.509 0,70.5 0,20 20,0 145,0 145,70 ; 37.491,70.534 cw(c37.75,71.5) 37.619,72.491 71.744,72.491 ; 37.619,70.509 71.631,70.509 ; 71.639,70.509 ccw(c71.509,71.5) 71.767,72.466 ; 75.25,70.534 cw(c75.509,71.5) 75.378,72.491 ; 75.369,70.509 99.991,70.509 100,70.5 100,70 145,70 ; 145,70 145,70

## Silkscreen, mask and mechanical layers (free items; w line width, h text height)
Top Overlay:
  circle w0.254: c141.8,3.2 r2.5
  circle w0.254: c141.8,66.8 r2.5
  circle w0.254: c3.2,66.8 r2.5
  circle w0.254: c17,8 r2.5
  circle w0.254: c80.25,99.25 r0.5
  circle w0.254: c88.25,96.75 r4.61
  lines w0.254: 77.25,96 76,96 76,96.75 76.5,96.75 80.25,100.5 79.5,101.25 79.5,102.25 81.25,100.5 82.5,100.5 85.25,100.5 ; 78,95.75 77.75,95.75 77.5,95.5 76.25,95.5 76,95.75 75.75,95.75 75.75,94.75 78.25,94.75 79.25,95.75 ; 79.25,97 80.5,97 ; 79.673,99.885 75.75,102.5 79,99.25 ; 82,100.5 83,99.5 83,100.5 84,99.5 84,100.5 85,99.5 85,100.5 ; 85,91.5 86,92.5 86,93.5 ; 85.25,98.5 83.25,98.5 81.75,97 80.5,97 ; 86,91.5 87,92.5 87,93 ; 89.75,91.25 90.25,91.75 90.25,93.5 ; 90.75,91.5 91.5,92.25 91.5,94.25 ; 92.75,98 ccw(c97.375,98.625) 98,94 ; 79,99.25 79,99.25 ; 79.25,95.75 79.25,95.75 ; 79.25,95.75 80.5,97
  text "pum" at 132,67.5 h1.52
  text "Moi." at 125.7,65.3 h1.52
  text "Pow." at 139,55.5 h1.52
  text "Lum." at 119.4,0.9 h1
Drill Drawing:
  circle w0.085: c151.006,101.185 r0.635
  circle w0.085: c151.006,70.705 r0.381
  circle w0.085: c151.006,70.705 r0.635
  lines w0.085: 150.371,62.767 150.688,62.767 151.006,62.45 151.323,62.767 151.641,62.767 151.323,63.085 151.641,63.402 151.323,63.402 151.006,63.72 150.688,63.402 150.371,63.402 150.688,63.085 150.371,62.767 ; 150.371,66.26 151.006,66.577 151.641,66.26 151.323,66.895 151.641,67.53 151.006,67.212 150.371,67.53 150.688,66.895 150.371,66.26 ; 150.371,74.197 150.688,74.197 150.688,73.88 151.323,73.88 151.323,74.197 151.641,74.197 151.641,74.832 151.323,74.832 151.323,75.15 150.688,75.15 150.688,74.832 150.371,74.832 150.371,74.197 ; 150.371,78.007 150.688,78.007 150.688,77.69 151.323,77.69 151.323,78.007 151.641,78.007 151.641,78.642 151.323,78.642 151.323,78.96 150.688,78.96 150.688,78.642 150.371,78.642 150.371,78.007 ; 150.371,82.135 151.006,81.5 151.641,82.135 151.006,82.77 150.371,82.135 ; 150.371,86.58 151.641,86.58 151.006,85.31 150.371,86.58 ; 150.371,89.12 151.641,89.12 151.641,90.39 150.371,90.39 150.371,89.12 ; 150.371,92.93 150.371,93.247 150.688,93.565 150.371,93.882 150.371,94.2 150.688,94.2 151.006,93.882 151.323,94.2 151.641,94.2 151.641,93.882 151.323,93.565 151.641,93.247 151.641,92.93 151.323,92.93 151.006,93.247 150.688,92.93 150.371,92.93 ; 150.371,96.74 151.006,97.057 151.641,96.74 151.323,97.375 151.641,98.01 151.006,97.692 150.371,98.01 150.688,97.375 150.371,96.74 ; 150.625,74.324 150.815,74.324 150.815,74.134 151.196,74.134 151.196,74.324 151.387,74.324 151.387,74.705 151.196,74.705 151.196,74.896 150.815,74.896 150.815,74.705 150.625,74.705 150.625,74.324 ; 150.625,86.326 151.387,86.326 151.006,85.564 150.625,86.326 ; 150.625,96.994 151.006,97.184 151.387,96.994 151.196,97.375 151.387,97.756 151.006,97.565 150.625,97.756 150.815,97.375 150.625,96.994
  lines w0.381: 148.64,61.307 247.166,61.307 ; 148.64,103.217 247.166,103.217 ; 162.633,57.497 162.633,107.027 ; 180.357,57.497 180.357,107.027 ; 214.535,57.497 214.535,107.027 ; 227.385,57.497 227.385,107.027 ; 148.64,57.497 247.166,57.497 247.166,107.027 148.64,107.027 148.64,57.497
  text "Symbol" at 150.926,104.36 h1.83
  text "Hit Count" at 163.776,104.36 h1.83
  text "Finished Hole Size" at 181.5,104.36 h1.83
  text "Plated" at 215.678,104.36 h1.83
  text "Hole Type" at 228.528,104.36 h1.83
  text "3" at 163.776,100.55 h1.52
  text "0.700mm (27.56mil)" at 181.5,100.55 h1.52
  text "PTH" at 215.678,100.55 h1.52
  text "Round" at 228.528,100.55 h1.52
  text "3" at 163.776,96.74 h1.52
  text "0.800mm (31.50mil)" at 181.5,96.74 h1.52
  text "PTH" at 215.678,96.74 h1.52
  text "Round" at 228.528,96.74 h1.52
  text "4" at 163.776,92.93 h1.52
  text "1.400mm (55.12mil)" at 181.5,92.93 h1.52
  text "PTH" at 215.678,92.93 h1.52
  text "Round" at 228.528,92.93 h1.52
  text "6" at 163.776,89.12 h1.52
  text "0.500mm (19.69mil)" at 181.5,89.12 h1.52
  text "PTH" at 215.678,89.12 h1.52
  text "Round" at 228.528,89.12 h1.52
  text "8" at 163.776,85.31 h1.52
  text "2.500mm (98.43mil)" at 181.5,85.31 h1.52
  text "NPTH" at 215.678,85.31 h1.52
  text "Round" at 228.528,85.31 h1.52
  text "16" at 163.776,81.5 h1.52
  text "0.500mm (19.69mil)" at 181.5,81.5 h1.52
  text "NPTH" at 215.678,81.5 h1.52
  text "Round" at 228.528,81.5 h1.52
  text "20" at 163.776,77.69 h1.52
  text "1.100mm (43.31mil)" at 181.5,77.69 h1.52
  text "PTH" at 215.678,77.69 h1.52
  text "Round" at 228.528,77.69 h1.52
  text "25" at 163.776,73.88 h1.52
  text "0.400mm (15.75mil)" at 181.5,73.88 h1.52
  text "PTH" at 215.678,73.88 h1.52
  text "Round" at 228.528,73.88 h1.52
  text "27" at 163.776,70.07 h1.52
  text "0.711mm (28.00mil)" at 181.5,70.07 h1.52
  text "PTH" at 215.678,70.07 h1.52
  text "Round" at 228.528,70.07 h1.52
  text "33" at 163.776,66.26 h1.52
  text "1.000mm (39.37mil)" at 181.5,66.26 h1.52
  text "PTH" at 215.678,66.26 h1.52
  text "Round" at 228.528,66.26 h1.52
  text "37" at 163.776,62.45 h1.52
  text "0.900mm (35.43mil)" at 181.5,62.45 h1.52
  text "PTH" at 215.678,62.45 h1.52
  text "Round" at 228.528,62.45 h1.52
  text "182 Total" at 163.776,58.64 h1.52
Board OutLine:
  lines w0.254: 33.985,72.5 8.75,72.5 3.75,77.5 8.75,82.5 80,82.5 80,92.5 8.75,92.5 3.75,97.5 9.25,103 100,103 100,72.5 99.991,72.491 75.369,72.491 ; 34.009,72.466 cw(c33.75,71.5) 33.881,70.509 0.009,70.509 0,70.5 0,20 20,0 145,0 145,70 ; 37.491,70.534 cw(c37.75,71.5) 37.619,72.491 71.744,72.491 ; 37.619,70.509 71.631,70.509 ; 71.639,70.509 ccw(c71.509,71.5) 71.767,72.466 ; 75.25,70.534 cw(c75.509,71.5) 75.378,72.491 ; 75.369,70.509 99.991,70.509 100,70.5 100,70 145,70 ; 145,70 145,70

## Text inside footprints (layer, text, board x,y; h text height)
B1: Top Overlay "20" at 14.1,10 h1.52 r90; Top Overlay "1" at 21.6,12 h1.52 r90
Q1: Top Overlay "3" at 121.025,60.537 h1.5; Top Overlay "1" at 121.025,63.055 h1.5
S1: Top Overlay "2 1 3" at 108,40 h1.52
U4: Top Overlay "8" at 140.25,41.75 h1.27 r270; Top Overlay "7" at 137.5,41.75 h1.27 r270; Top Overlay "1" at 137.492,53.282 h1.27 r270; Top Overlay "2" at 140.032,53.79 h1.27 r270
U5: Top Overlay "16" at 34.96,34.4 h1.52 r270; Top Overlay "15" at 37.46,34.4 h1.52 r270; Top Overlay "2" at 34.96,11.4 h1.52 r270; Top Overlay "1" at 37.96,11.4 h1.52 r270